# Altium PCB clap switch pcb.PcbDoc
Units mil, origin at the board's own origin, x right, y up, seen from the top; angles counter-clockwise.
Board outline 2800.01 x 1755.03 mil, 2 copper layers (Top Layer, Bottom Layer); 10 components, 7 nets, 29 pads, 5 vias.
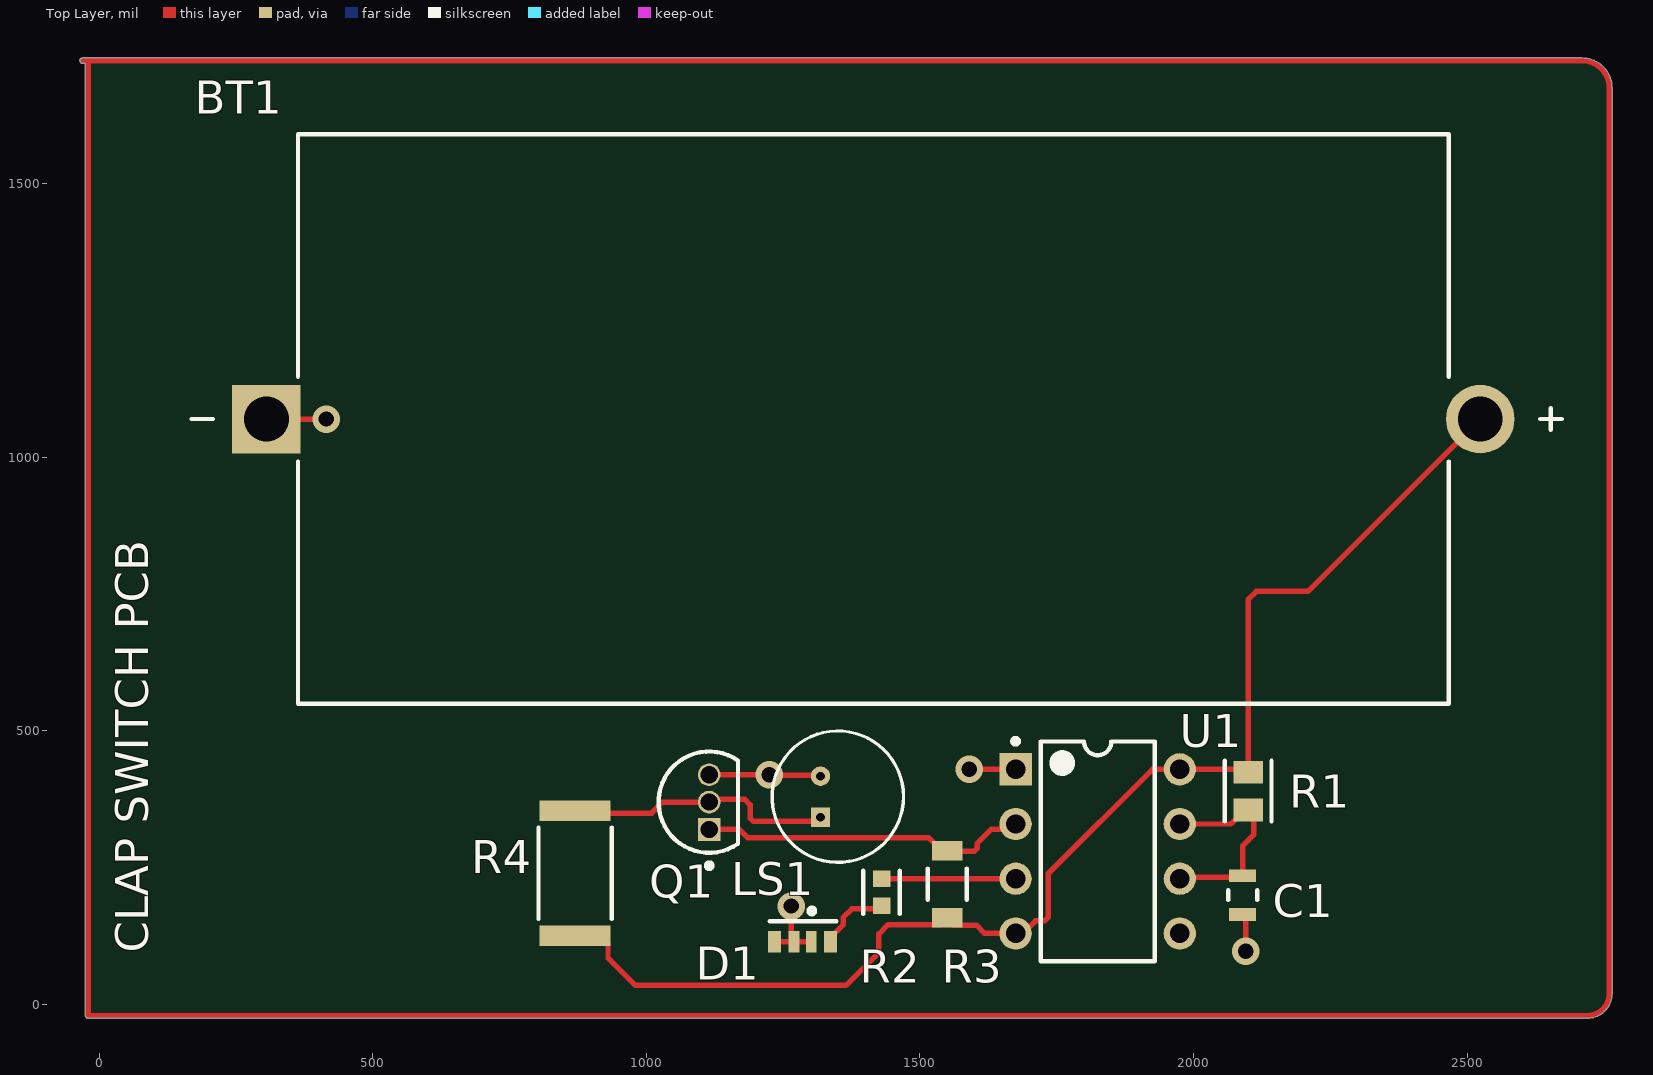
[diagram p0: Top Layer view]
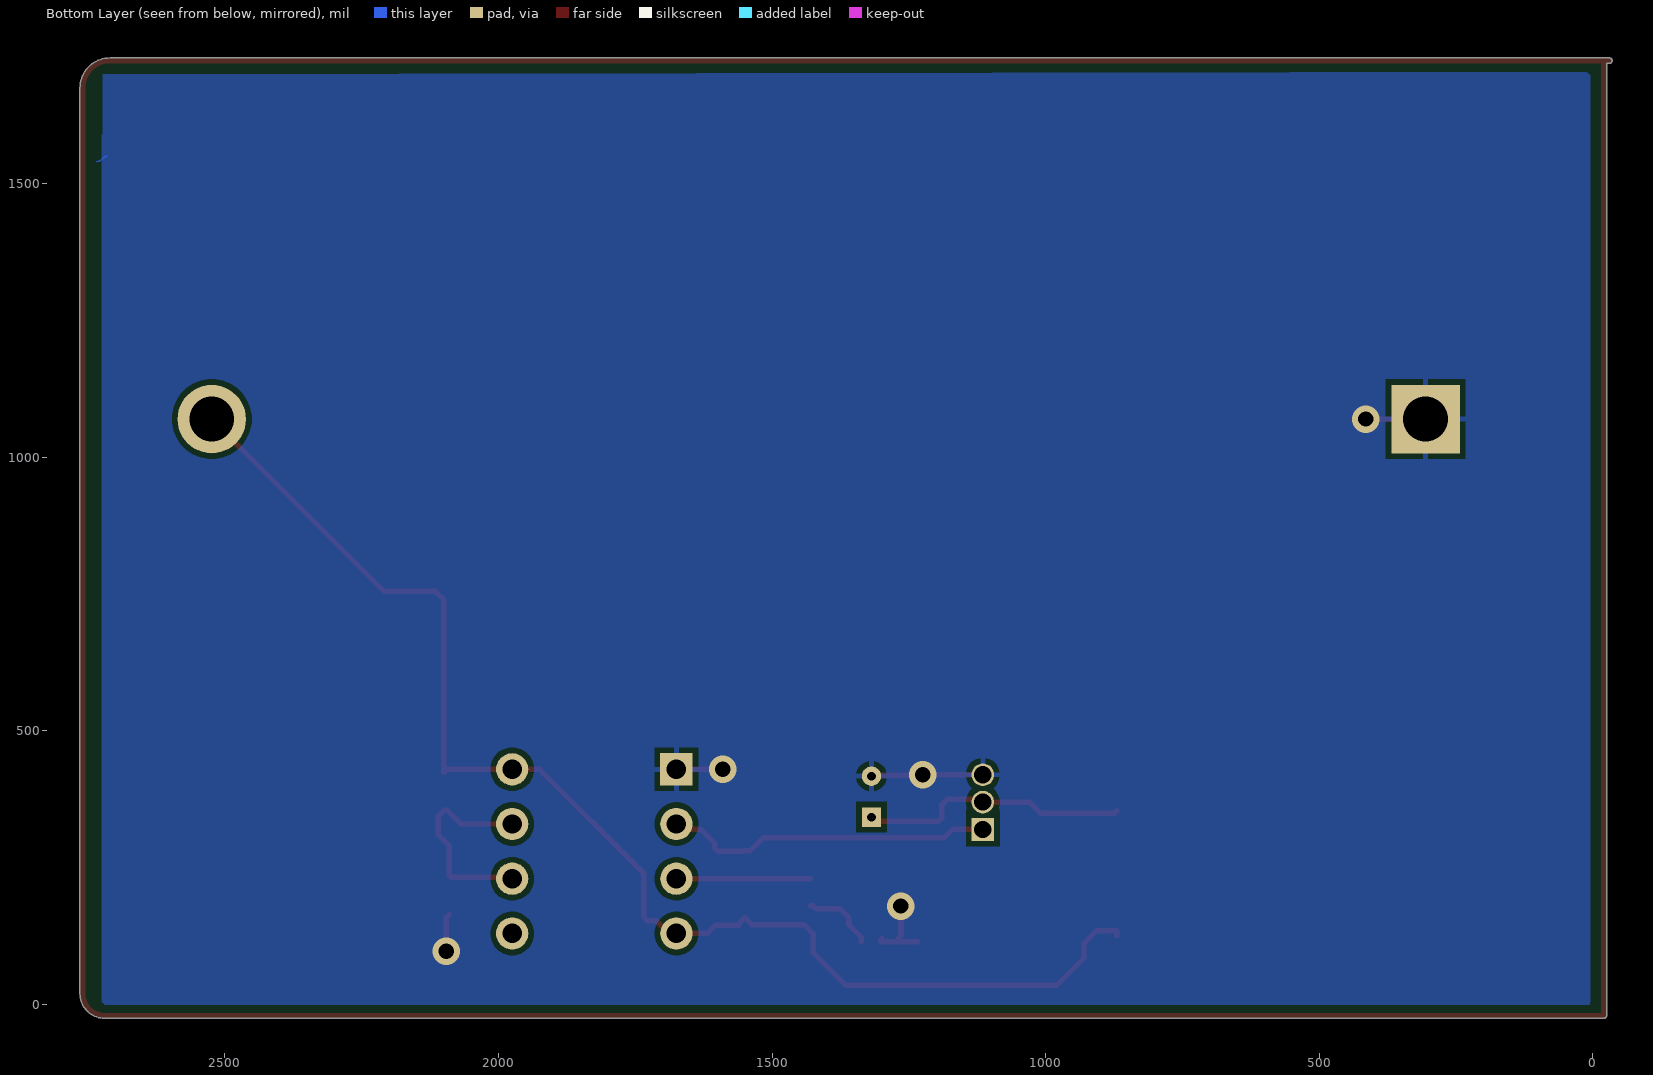
[diagram p1: Bottom Layer view, seen from below]
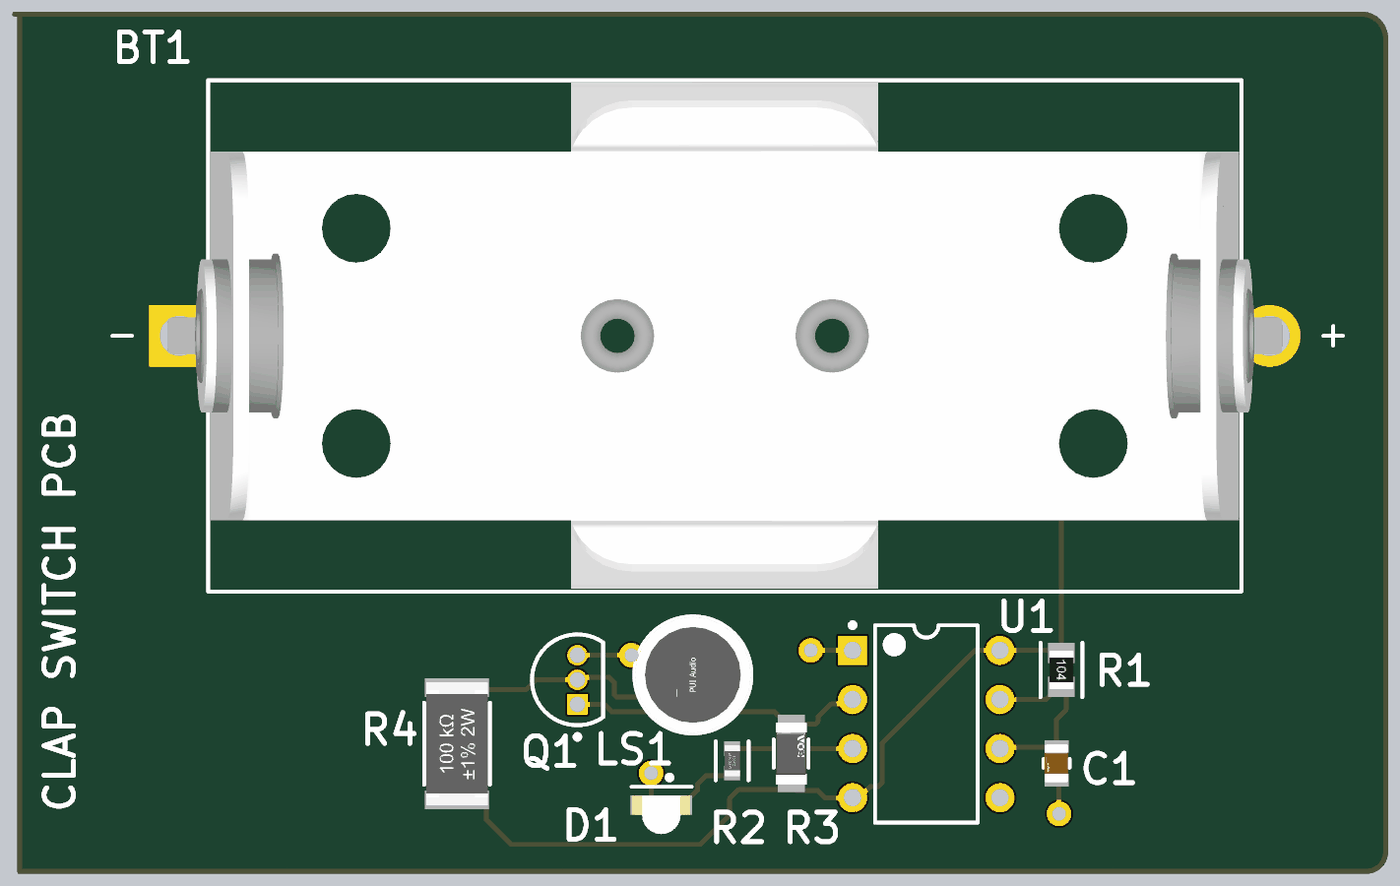
[diagram p2: 3D render of the assembled board from above, using the file's embedded part models]

## Layer stack, top to bottom
Top Solder: solder mask 0.4, Solder Resist, Dk 3.5
Top Layer: signal copper 1.4
Dielectric 1: dielectric 12.6, FR-4, Dk 4.8
Bottom Layer: signal copper 1.4
Bottom Solder: solder mask 0.4, Solder Resist, Dk 3.5

## Board outline
-25.01,-20 -25.02,1719.98 -30,1719.98 cw(c-30,1725) -30,1730.01 2710,1730.02 cw(c2710,1675) 2765.02,1675 2765.02,20 cw(c2720,20) 2720,-25.01 -20,-25.01 cw(c-20,-20)

## Design rules (kind name [scope] priority, off if disabled: settings)
Clearance [All] p1: gap=10 ignorepadtopadclearanceinfootprint=FALSE
PolygonConnect [All] p1: connectstyle=Relief reliefconductorwidth=10 reliefentries=4 polygonreliefangle="90 Angle" airgapwidth=10
RoutingVias [All] p1: holewidth=28 width=50 viastyle="Through Hole" minholewidth=28 minwidth=50 maxholewidth=28 maxwidth=50
SolderMaskExpansion [All] p1: expansion=4 istentingtop=FALSE
SupplyNets "Schematic Supply Nets" [InNet('GND')] p1: voltage=0.000
Width [All] p1: maxlimit=10 minlimit=10 preferedwidth=10
30 further rules are at their usual default settings.

## Components (designator, comment, footprint, x,y, rotation, side; value= is the part's Value field where it differs from the comment)
BT1 "2224" FP-2224-MFG 1415,1070 r0 top
C1 "GRM21BR61C106KE15K" FP-GRM21B-0_1-MFG 2090,200 r270 top
D1 "12-23A/R6GHBHC-A01/2D" FP-12-23A-MFG 1285.75,115 r180 top
LS1 "POM-2738P-R" FP-POM-2738P-R-MFG 1350,380 r90 top value=2.2kΩ
Q1 "BC547B" ONSC-TO-92-3-29-11 1115,370 r90 top
R1 "RQ73C2A100KBTD" FP-RQ73C2A-IPC_B 2100,390 r270 top
R2 "CRGCQ0603J220K" FP-CRGCQ0603-IPC_C 1430,205 r270 top value=220KΩ
R3 "RN73R2BTTD1001F25" FP-RN73R2B-MFG 1550,220 r90 top
R4 "CRGP2512F47K" FP-CRGP2512-IPC_C 870,240 r90 top value=47KΩ
U1 "NE555P" P0008A 1825,280 r0 top

## Footprints (in the part's own frame and the unit in brackets; to place one, negate y for a bottom-side part, rotate by r counter-clockwise, add the part's x,y. Pads: shape width x height; smd on the part's side, far side on the other; paste and mask are expansions set on the pad)
FP-12-23A-MFG [mm]
  rect 0.5x1 smd paste+0 mask+0: 1(-0.4,0) 2(0.4,0)
  rect 0.6x1 smd paste+0 mask+0: 3(1.3,0) 4(-1.3,0)
  silkscreen extent -1.57,-1.55 1.53,-0.94, body extent -1.7,-0.65 1.7,1.65, height 0.25
FP-2224-MFG [mm]
  rect 3.18x3.18 hole 2.08 paste-2539.97 mask+0: 1(-28.17,0)
  round 3.18 hole 2.08 paste-2539.97 mask+0: 2(28.17,0)
  silkscreen extent -31.65,-13.22 31.95,13.22, body extent -29.86,-13.32 29.86,13.32, height 0.25
FP-CRGCQ0603-IPC_C [mil]
  rect 29.85x31.97 smd paste+0 mask+0: 1(-24.68,0) 2(24.68,0)
  silkscreen extent -40,-33 40,33, body extent -44,-22 44,22, height 10
FP-CRGP2512-IPC_C [mil]
  rect 37.72x130.17 smd paste+0 mask+0: 1(-114.25,0) 2(114.25,0)
  silkscreen extent -84,-67 84,67, body extent -137,-71 137,71, height 10
FP-GRM21B-0_1-MFG [mm]
  rect 0.6x1.25 smd paste+0 mask+0: 1(-0.9,0) 2(0.9,0)
  silkscreen extent -0.23,-0.67 0.23,0.67, body extent -1.3,-0.77 1.3,0.77, height 0.25
FP-POM-2738P-R-MFG [mm]
  rect 0.9x0.9 hole 0.4 paste-2539.97 mask+0: 1(-0.95,0.8)
  round 0.9 hole 0.4 paste-2539.97 mask+0: 2(0.95,0.8)
  silkscreen extent -3.05,-3.05 3.05,3.05, body extent -3.15,-3.15 3.15,3.15, height 0.25
FP-RN73R2B-MFG [mm]
  rect 0.9x1.4 smd paste+0 mask+0: 1(-1.55,0) 2(1.55,0)
  silkscreen extent -0.72,-0.9 0.72,0.9, body extent -2.1,-1 2.1,1, height 0.25
FP-RQ73C2A-IPC_B [mil]
  rect 41.66x53.63 smd paste+0 mask+0: 1(-34.53,0) 2(34.53,0)
  silkscreen extent -55,-43 55,43, body extent -65,-37 65,37, height 10
ONSC-TO-92-3-29-11 [mm] "TO, 3-Leads, Body Dia 4.7mm, Pitch 1.27mm"
  rect 1.05x1.05 hole 0.8: 1(-1.27,0)
  round 1.05 hole 0.8: 2(0,0) 3(1.27,0)
  silkscreen extent -3.07,-1.34 2.35,2.35, body extent -2.35,-1.33 2.36,2.36, height 7.87
P0008A [mm] "DIP, 8-Leads, Body 10.15x6.6mm, Pitch 2.54mm"
  rect 1.5x1.5 hole 0.9: 1(-3.81,3.81)
  round 1.5 hole 0.9: 2(-3.81,1.27) 3(-3.81,-1.27) 4(-3.81,-3.81) 5(3.81,-3.81) 6(3.81,-1.27) 7(3.81,1.27) 8(3.81,3.81)
  silkscreen extent -3.93,-5.1 2.65,5.23, body extent -3.95,-5.07 3.95,5.07, height 5.08

## Part data
BT1: library part CMP-19636-000012-1, "BATTERY HOLDER C PC PIN", Case/Package=Aluminum, Package Quantity=1, Lead Free="Lead Free", Material=Polyethylene, Mount="Through Hole", Number of Batteries=1, Number of Cells=1, Packaging=Bulk, REACH SVHC="No SVHC", RoHS Compliant=No, Series=-, Termination="PC Pin"
C1: library part CMP-2007-03534-2, "Chip Multilayer Ceramic Capacitors for General Purpose, 0805, 10uF, X5R, 15%, 10%, 16V", Capacitance=10uF, Case Code (Imperial)=0805, Case Code (Metric)=2012, Dielectric=X5R, Max Operating Temperature=85°C, Min Operating Temperature=-55°C, Package Quantity=10000, Tolerance=10%, Voltage=16V, Case/Package=0805, Depth=1.25mm, Height=1.25mm, Length=2mm, Mount="Surface Mount", Packaging="Tape and Reel", Radiation Hardening=No, REACH SVHC="No SVHC", Termination=SMD/SMT, Thickness=0.053inch, Voltage Rating=16V, Voltage Rating (DC)=16V, Width=0.049inch
D1: library part CMP-51564-000005-1, "LED RGB CLEAR CHIP SMD R/A", Colour="Red, Green, Blue", Forward Current=20mA, Forward Voltage=2/3.3/3.3V, Manufacturer=Everlight, Package=12-23A, Power Dissipation=60/110/110mW, Reverse Voltage=5V, Temperature="-40°C to +85°C", Temperature Range High=+85°C, Temperature Range Low=-40°C, Automotive=No, Category=Diode, ComponentLink2Description=Datasheet, ComponentLink2URL=https://media.digikey.com/pdf/Data%20Sheets/Everlight%20PDFs/12-23A,R6GHBHC-A01,2D.pdf, Device Class L1=Optoelectronics, Device Class L2=LEDs, Device Class L3=unset, Digikey Description="LED RGB CLEAR CHIP SMD R/A", Height=2.1mm, Lead Free=Yes, Led Orientation="Side View", Luminous Intensity=90/180/72mcd, Manufacturer Part Number=12-23A/R6GHBHC-A01/2D, Mouser Description="Standard LEDs - SMD RGB WATER CLEAR RIGHT ANGLE LENS", Octopart=https://octopart.com/12-23a%2Fr6ghbhc-a01%2F2d-everlight-10561613, Peak Emmision Wavelength=632/518/468nm, RoHS=TRUE, Viewing Angle=120°, Wavelength=624/525/470nm
LS1: library part CMP-103887-000001-1, "MIC COND ANALOG OMNI -38DB", Current=0.5mA, Manufacturer="PUI Audio, Inc.", Max Supply Voltage=10V, Operating Supply Voltage=2V, Package=0, Resistance=2.2kΩ, Automotive=No, Category=Speak, ComponentLink2Description=Datasheet, ComponentLink2URL=http://www.puiaudio.com/pdf/POM-2738P-R.pdf, Device Class L1=Electromechanical, Device Class L2="Audio Products", Device Class L3=Microphones, Digikey Description="MIC COND ANALOG OMNI -38DB", Direction=Omidirectional, Height=2.9mm, Lead Free=Yes, Manufacturer Part Number=POM-2738P-R, Mouser Description="Mic Omni-Directional 2200Ohm -38±3dB 10Vdc Round Pin", Octopart=https://octopart.com/pom-2738p-r-pui+audio-19251807, RoHS=TRUE
Q1: library part CMP-1048-01467-1, "Amplifier Transistor, NPN Silicon, 3-Pin TO-92, Bulk Box", Manufacturer="On Semiconductor", ComponentLink1Description="Manufacturer URL", ComponentLink1URL=http://www.onsemi.com/, ComponentLink2Description=Datasheet, ComponentLink2URL=http://www.onsemi.com/pub_link/Collateral/BC546-D.PDF, ComponentLink3Description="Package Specification", ComponentLink3URL=http://www.onsemi.cn/pub_link/Collateral/2N6426-D.PDF, DatasheetVersion="Rev. 7", fT Min (MHz)=150, IC Continuous (A)=0.1, Mounting Technology="Through Hole", PackageDescription="3-Pin Transistor Outline, Body 4.825 x 3.685 mm, Pitch 1.27 mm", PackageReference=TO-92-3-29-11_AM_SL, PackageVersion="Rev. AM", Packing="Bulk Box", PartNumber=BC547B, Polarity=NPN, RoHS=FALSE
R1: library part CMP-03211-011351-1, "RQ73 0805 100KΩ 0.2W 10ppm/°C 0.1% 100V"
R2: library part CMP-03211-002747-1, "CRGCQ0603 220KΩ 5% ±100ppm/°C 75V", Ambient Temperature Range High=+70°C, Manufacturer="TE Connectivity", Package=CRGCQ0603, Power Rating=0.1W, Resistance=220KΩ, Temperature="-55°C to +155°C", Temperature Coefficient=±100ppm/°C, Temperature Range High=+155°C, Temperature Range Low=-55°C, Tolerance=0.05, Voltage Rating=75V, Category=Res, ComponentLink2Description=Datasheet, ComponentLink2URL=https://www.te.com/commerce/DocumentDelivery/DDEController?Action=showdoc&DocId=Data+Sheet%7F1773204-3%7F1%7Fpdf%7FEnglish%7FENG_DS_1773204-3_1.pdf%7F4-2176339-1223, Composition="Thick Film", Device Class L1="Passive Components", Device Class L2=Resistors, Device Class L3="Chip SMD Resistors", Height=0.55mm, Ipc Land Pattern Name=RESC16080X45, Lead Free=Yes, Manufacturer Part Number=CRGCQ0603J220K, Octopart=https://octopart.com/crgcq0603j220k-te+connectivity-91018110, RoHS=TRUE, Series=CRGCQ
R3: library part CMP-04015-029161-1, "1kΩ ±1% 0.25W, 1/4W Chip Resistor 1206 (3216 Metric) Moisture Resistant Thin Film"
R4: library part CMP-03211-002823-1, "CRGP 2512 47K 1%", Ambient Temperature Range High=+70°C, Manufacturer=TE, Package=CRGP2512, Power Rating=2W, Resistance=47KΩ, Temperature="-55°C to +155°C", Temperature Coefficient=±100ppm/°C, Temperature Range High=+155°C, Temperature Range Low=-55°C, Tolerance=0.01, Voltage Rating=500V, Automotive=No, Category=Res, ComponentLink2Description=Datasheet, ComponentLink2URL=https://www.mouser.ca/datasheet/2/418/NG_DS_9-1773463-9_A-1358566.pdf, Composition="Thick Film", Device Class L1="Passive Components", Device Class L2=Resistors, Device Class L3="Chip SMD Resistors", Digikey Description="CRGP 2512 47K 1%", Height=0.65mm, Ipc Land Pattern Name=RESC635320X55, Lead Free=Yes, Manufacturer Part Number=CRGP2512F47K, Octopart=https://octopart.com/crgp2512f47k-te+connectivity-91019068, RoHS=TRUE, Series=CRGP
U1: library part CMP-2000-04954-1, "Precision Timer, 4.5 to 16 V, 0 to 70 degC, 8-Pin DIP, Pb-Free, Tube", Manufacturer=TexasInstruments, Maximum High Level Output Current=-200mA, Maximum Low Level Output Current=200mA, Operating Supply Voltage=5, Package=8PDIP, Package Description="8-Pin Double In-line Package, Body 9.59 x 6.35 mm, Pitch 2.54 mm", Package Reference=P8, Category=Timer, Datasheet URL=http://www.ti.com/general/docs/lit/getliterature.tsp?genericPartNumber=NE555&fileType=pdf, Datasheet Version="Rev. I, 09/2014", Manufacturer URL=http://www.ti.com/, Number of Internal Timers=1, Package URL=http://www.ti.com/lit/ml/mpdi001b/mpdi001b.pdf, Packaging=Rail/Tube, Rad Hard=No, Type=Standard

## Via types
v1: diameter 50, hole 28, Top Layer to Bottom Layer, 5 vias

## Nets (pads, with @x,y where several pads share a name; then routed paths per layer and width w, separated by ;. In a path a pad name is that pad's centre, name@x,y a point inside that pad or via, vN(x,y) a via of type N, cw(c..) or ccw(c..) an arc to the next point about the centre after c; other vN are vias at no path point)
GND: BT1.1 C1.2 D1.1 D1.2 D1.3 LS1.2 Q1.3 U1.1 | length 611.3
  Top Layer w10: BT1.1 v1(415,1070) ; Q1.3 v1(1225,420) 1226.3,418.7 1311.3,418.7 1315,415 1317.4,417.4 LS1.2 ; D1.3 D1.2 ; v1(1265,180) 1265,140 1265.16,139.84 1265.16,124.84 1270,120 D1.2 ; D1.1 1301.5,118.5 1300,120 1300,118.35 1296.65,115 D1.2 ; v1(1590,430) U1.1 ; C1.2 2095.31,159.26 v1(2095.31,97.2)
NetBT1_2: BT1.2 R1.1 R3.1 R4.1 U1.4 U1.8 | length 2467.8
  Top Layer w10: R4.1 870,135 906.97,135 930.08,111.89 930.08,84.92 980,35 1365,35 1425,95 1425,129.14 1442.12,146.26 1537.28,146.26 R3.1 1560,148.98 1560,145 1603.36,145 1618.36,130 U1.4 1688.27,130 1711.2,152.93 1727.93,152.93 1735,160 1735,240 1925,430 1965,430 1970,425 U1.8 2094.53,430 R1.1 2100,740 2115,755 2209.06,755 2509.06,1055 2540,1055 2525,1070 BT1.2
NetC1_1: C1.1 R1.2 U1.6 U1.7 | length 392.3
  Top Layer w10: U1.6 1990,230 1992.72,232.72 2087.28,232.72 C1.1 2090,290 2110,310 2110,345 2100,355 R1.2 2094.02,355.47 2068.54,330 1980,330 1975,325 U1.7
NetD1_4: D1.4 R2.2 | length 132.5
  Top Layer w10: D1.4 1336.93,122.87 1359.8,145.74 1359.8,158.94 1375.86,175 1420,175 1425.32,180.32 R2.2
NetLS1_1: LS1.1 Q1.2 R4.2 | length 494.5
  Top Layer w10: R4.2 874.25,350 1010,350 1030,370 Q1.2 1120,375 1180,375 1190,365 1190,340.86 1195.86,335 1310.91,335 LS1.1
NetQ1_1: Q1.1 R3.2 U1.2 | length 602.6
  Top Layer w10: Q1.1 1170,320 1185,305 1516.18,305 1540.16,281.02 R3.2 1551.02,280 1599.14,280 1605,285.86 1605,295 1630.61,320.61 1655.61,320.61 1665,330 U1.2
NetR2_1: R2.1 U1.3 | length 245.3
  Top Layer w10: R2.1 1439.68,229.68 1440,230 1440.16,229.84 1674.84,229.84 U1.3
pads on no net: U1.5
copper on no net: | length 9016.4
  Top Layer w10: -30,1725 2710,1725 cw(c2710,1675) 2760,1675 2760,20 cw(c2720,20) 2720,-20 -20,-20 -20,1720

## Polygon pours and split planes (outlines as drawn)
GND on Bottom Layer "GND_L02_P003" (solid, pour order 3): 5,1705 5,5 0,0 2720,0 2725,5 2725,1701.44 2723.73,1702.71 2723.73,1591.27 2725,1590 2725,1700
no net on Bottom Layer "NONET_L02_P005" (solid, pour order 5): 2715,1550 2720,1550 2730,1540 2735,1540

## Silkscreen, mask and mechanical layers (free items; w line width, h text height)
Top Overlay:
  text "CLAP SWITCH PCB" at 90,95 h60 r90